# Altium PCB 十六路输出.PcbDoc (part 1 of 3)
Units mm, origin at the board's own origin, x right, y up, seen from the top; angles counter-clockwise.
Board outline 122.4 x 87.4 mm, 2 copper layers (Top Layer, Bottom Layer); 99 components, 112 nets, 383 pads, 41 vias.
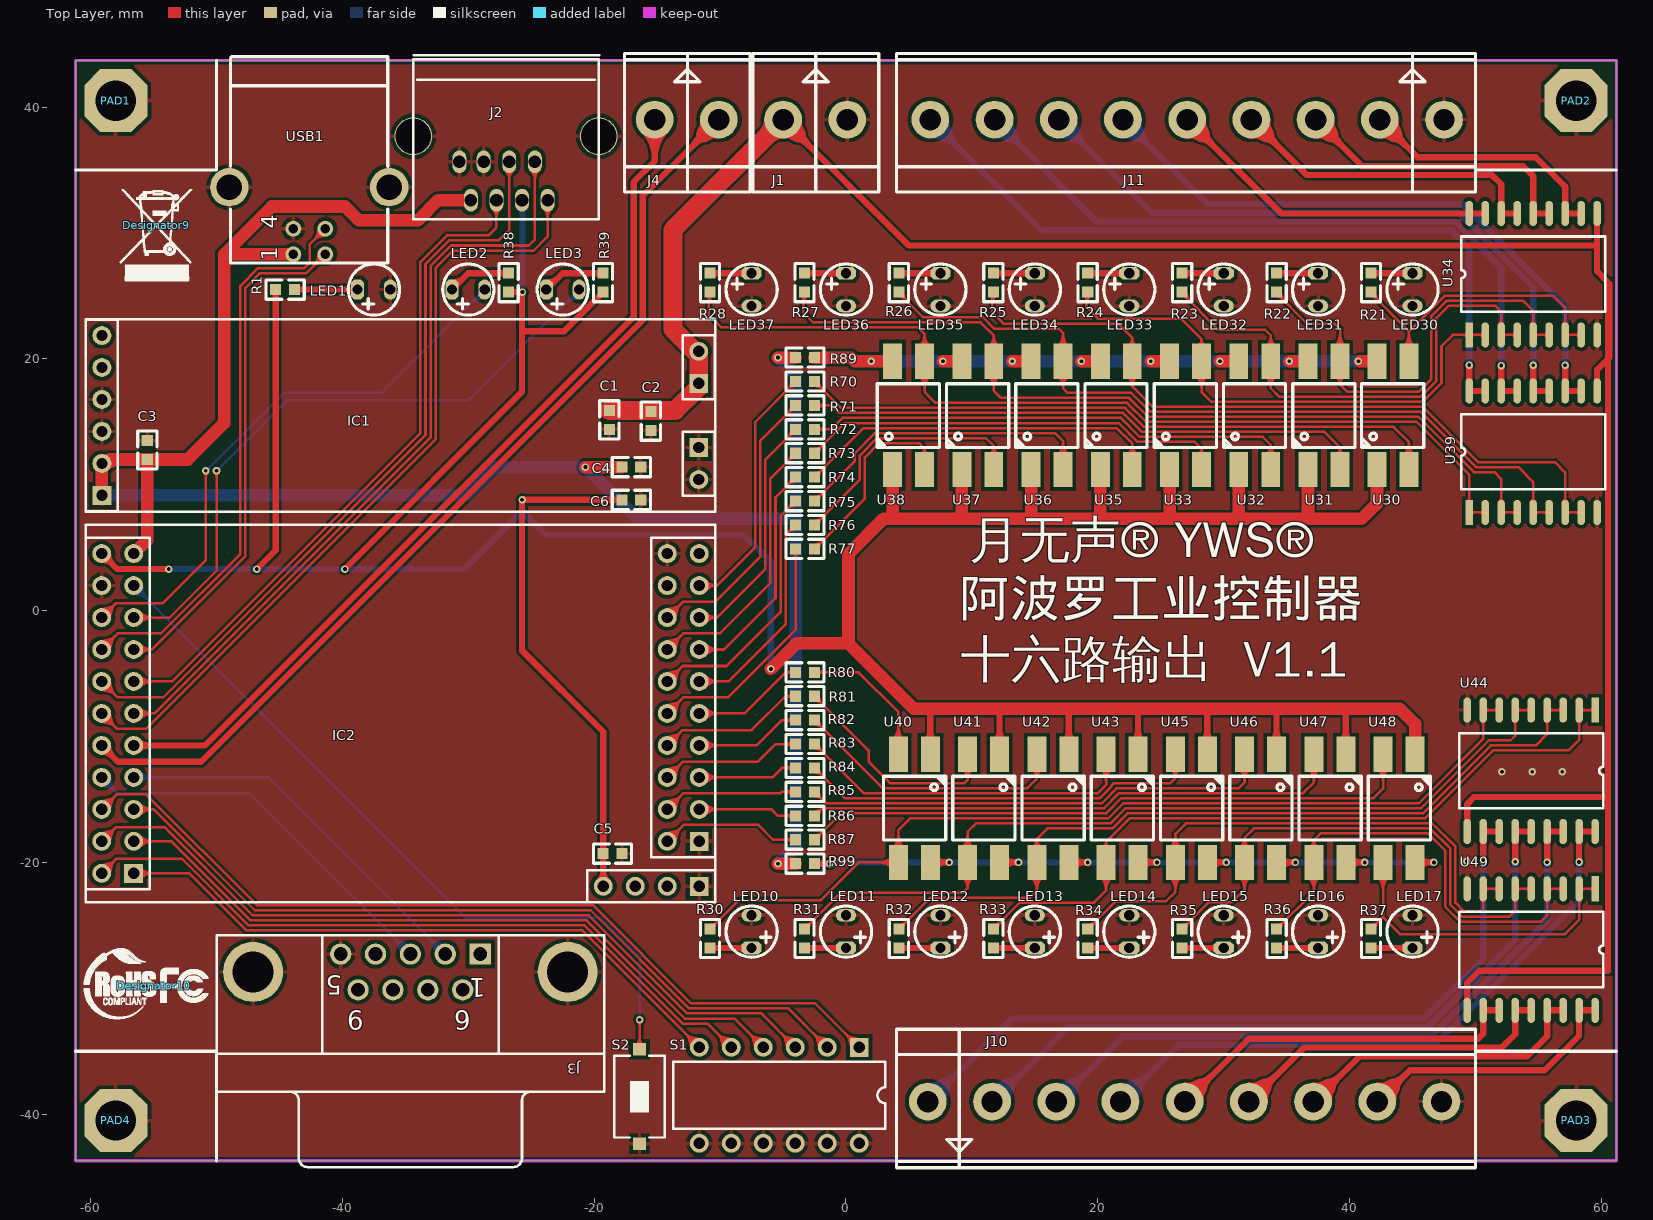
[diagram p0: Top Layer view]
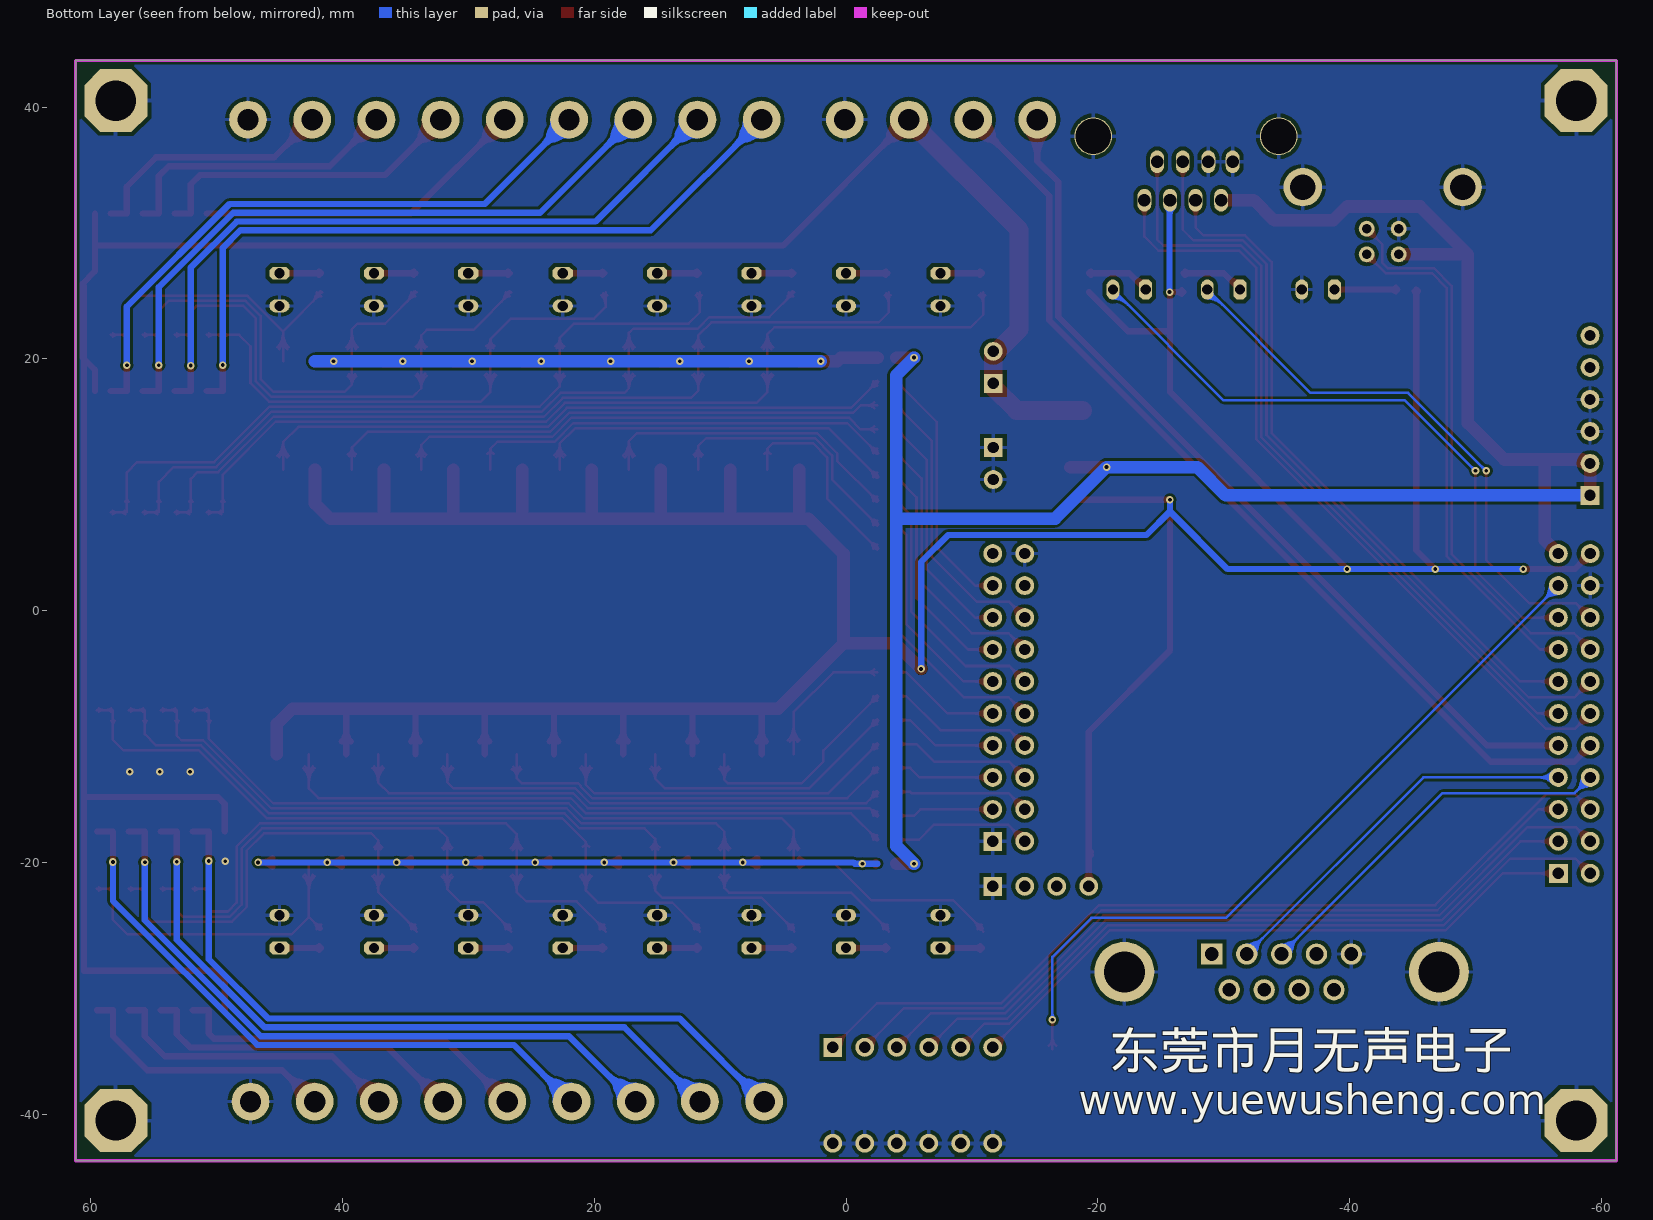
[diagram p1: Bottom Layer view, seen from below]

## Layer stack, top to bottom
Top Layer: signal copper 0.0356
Dielectric: dielectric 0.32, FR-4, Dk 4.8
Bottom Layer: signal copper 0.0356

## Board outline
-61.2,-43.7 61.2,-43.7 61.2,43.7 -61.2,43.7

## Design rules (kind name [scope] priority, off if disabled: settings)
Clearance [(InPadClass('All Pads')) vs InPolygon] p1: gap=0.3
Clearance Clearance_1 [All] p2: gap=0.2
ComponentClearance [All] p1 off: gap=0.254 collisioncheckmode=3 verticalgap=0.254 showdistances=FALSE
PlaneConnect [All] p1: planeconnectstyle=Relief reliefexpansion=0 reliefentries=4 reliefconductorwidth=0.3 reliefairgap=0.508
PolygonConnect PolygonConnect_1 [All vs IsComponentPad] p1: connectstyle=Relief reliefconductorwidth=0.3 reliefentries=4 polygonreliefangle="90 Angle" airgapwidth=0.3
PolygonConnect [All] p2: connectstyle=Direct reliefconductorwidth=0.3 reliefentries=4 polygonreliefangle="90 Angle" airgapwidth=0.3
RoomDefinition 3、十六路输出 [InComponentClass('3、十六路输出')] p1: confinementstyle=ConfineIn formatcopy=TRUE lockcomponents=FALSE outline -12,23.5 -12,28 3.5,28 3.5,46.6 62,46.6 62,-46.8 3.5,-46.8 3.5,-28 -12,-28 -12,-23.5 -9,-23.5 -9,23.5
RoomDefinition 公共电路 [InComponentClass('公共电路')] p2: confinementstyle=ConfineIn formatcopy=TRUE lockcomponents=FALSE outline -62,-44.5 3.5,-44.5 3.5,-43.7 61.2,-43.7 61.2,43.7 50,43.7 50,35 61.2,35 61.2,-35 50,-35 50,-43.7 3.5,-43.7 3.5,-28 -12,-28 -12,-23.5 -9.5,-23.5 -9.5,23.5 -12,23.5 -12,28 3.5,28 3.5,44.5 -62,44.5
RoutingVias [All] p1: holewidth=0.3 width=0.6 viastyle="Through Hole" minholewidth=0.3 minwidth=0.6 maxholewidth=0.3 maxwidth=0.6
SolderMaskExpansion [All] p1: expansion=0.102
Width [All] p1: maxlimit=2 minlimit=0.16 preferedwidth=0.2 minimp=50.000000 maximp=50.000000 favimp=50.000000
26 further rules are at their usual default settings.

## Classes and differential pairs
component class 公共电路: C1 C2 C3 C4 C5 C6 Designator9 Designator10 IC1 IC2 J1 J2 J3 J4 LED1 LED2 LED3 PAD1 PAD2 PAD3 PAD4 R1 R38 R39 S1 S2 usb1
component class 3、十六路输出: J10 J11 LED10 LED11 LED12 LED13 LED14 LED15 LED16 LED17 LED30 LED31 LED32 LED33 LED34 LED35 LED36 LED37 R21 R22 R23 R24 R25 R26 R27 R28 R30 R31 R32 R33 R34 R35 R36 R37 R70 R71 R72 R73 R74 R75 R76 R77 R80 R81 R82 R83 R84 R85 R86 R87 R89 R99 U30 U31 U32 U33 U34 U35 U36 U37 U38 U39 U40 U41 U42 U43 U44 U45 U46 U47 U48 U49

## Components (designator, comment, footprint, x,y, rotation, side; value= is the part's Value field where it differs from the comment)
C1 "104" 0603A -18.8,15.9 r270 top
C2 "104" 0603A -15.5,15.8 r270 top
C3 "104" 0603A -55.5,12 r90 top
C4 "104" 0603A -17.8,11.4 r0 top
C5 "104" 0603A -19.3,-19.3 r0 top
C6 "104" 0603A -17.8,8.8 r0 top
Designator9 "" HS -54.8,30.6 r0 top
Designator10 "" fc -55,-29.8 r0 top
IC1 "扩展模块电源板" 扩展模块电源板 -35.4,15.5 r180 top
IC2 "扩展模块核心板" 扩展模块核心板 -35.4,-8.2 r0 top
J1 "CON2" CON2*5.1 0.1,39 r0 top
J2 "CON8" "od-rj45 - duplicate" -23.7,32.6 r180 top
J3 "D Connector 9" DSUB1.385-2H9 -34.6,-38.2 r180 top
J4 "CON2" CON2*5.1 -10.1,39 r0 top
J10 "CON9" CON9*5.1 6.5,-39 r180 top
J11 "CON9" CON9*5.1 47.5,39 r0 top
LED1 "LED" LED2.5 -37.5,25.5 r180 top
LED2 "LED" LED2.5 -30,25.5 r180 top
LED3 "LED" LED2.5 -22.5,25.5 r180 top
LED10 "LED" LED2.5 -7.5,-25.5 r270 top (schematic designator LED18)
LED11 "LED" LED2.5 0,-25.5 r270 top
LED12 "LED" LED2.5 7.5,-25.5 r270 top
LED13 "LED" LED2.5 15,-25.5 r270 top
LED14 "LED" LED2.5 22.5,-25.5 r270 top
LED15 "LED" LED2.5 30,-25.5 r270 top
LED16 "LED" LED2.5 37.5,-25.5 r270 top
LED17 "LED" LED2.5 45,-25.5 r270 top
LED30 "LED" LED2.5 45,25.5 r90 top
LED31 "LED" LED2.5 37.5,25.5 r90 top
LED32 "LED" LED2.5 30,25.5 r90 top
LED33 "LED" LED2.5 22.5,25.5 r90 top
LED34 "LED" LED2.5 15,25.5 r90 top
LED35 "LED" LED2.5 7.5,25.5 r90 top
LED36 "LED" LED2.5 0,25.5 r90 top
LED37 "LED" LED2.5 -7.5,25.5 r90 top
PAD1 "PAD" PAD -58,40.5 r0 top
PAD2 "PAD" PAD 58,40.5 r0 top
PAD3 "PAD" PAD 58,-40.5 r0 top
PAD4 "PAD" PAD -58,-40.5 r0 top
R1 "160" 0603A -45.3,25.5 r0 top
R21 "560R" 0603A 41.7,25.3 r90 top
R22 "560R" 0603A 34.2,25.3 r90 top
R23 "560R" 0603A 26.7,25.3 r90 top
R24 "560R" 0603A 19.2,25.3 r90 top
R25 "560R" 0603A 11.7,25.3 r90 top
R26 "560R" 0603A 4.2,25.3 r90 top
R27 "560R" 0603A -3.3,25.3 r90 top
R28 "560R" 0603A -10.8,25.3 r90 top
R30 "560R" 0603A -10.8,-25.3 r270 top
R31 "560R" 0603A -3.3,-25.3 r270 top
R32 "560R" 0603A 4.2,-25.3 r270 top
R33 "560R" 0603A 11.7,-25.3 r270 top
R34 "560R" 0603A 19.2,-25.3 r270 top
R35 "560R" 0603A 26.7,-25.3 r270 top
R36 "560R" 0603A 34.2,-25.3 r270 top
R37 "560R" 0603A 41.7,-25.3 r270 top
R38 "160" 0603A -26.8,25.3 r90 top
R39 "160" 0603A -19.3,25.3 r90 top
R70 "51" 0603A -4,18.2 r0 top
R71 "51" 0603A -4,16.3 r0 top
R72 "51" 0603A -4,14.4 r0 top
R73 "51" 0603A -4,12.5 r0 top
R74 "51" 0603A -4,10.6 r0 top
R75 "51" 0603A -4,8.7 r0 top
R76 "51" 0603A -4,6.8 r0 top
R77 "51" 0603A -4,4.9 r0 top
R80 "51" 0603A -4,-4.9 r0 top
R81 "51" 0603A -4,-6.8 r0 top
R82 "51" 0603A -4,-8.7 r0 top
R83 "51" 0603A -4,-10.6 r0 top
R84 "51" 0603A -4,-12.5 r0 top
R85 "51" 0603A -4,-14.4 r0 top
R86 "51" 0603A -4,-16.3 r0 top
R87 "51" 0603A -4,-18.2 r0 top
R89 "NC" 0603A -2.5,20.1 r180 top
R99 "NC" 0603A -2.5,-20.1 r180 top
S1 "SW DIP-6" DIP-12/SW -5.3,-38.5 r180 top
S2 "RESRT" SW-PB2 -16.4,-38.6 r270 top
U30 "TLP521-1" PC817 42.175,11.5 r90 top
U31 "TLP521-1" PC817 36.7,11.5 r90 top
U32 "TLP521-1" PC817 31.2,11.5 r90 top
U33 "TLP521-1" PC817 25.7,11.5 r90 top
U34 "ULN2803" SOL18 49.5,21.9 r90 top
U35 "TLP521-1" PC817 20.2,11.5 r90 top
U36 "TLP521-1" PC817 14.7,11.5 r90 top
U37 "TLP521-1" PC817 9.2,11.5 r90 top
U38 "TLP521-1" PC817 3.7,11.5 r90 top
U39 "ULN2803" SOL18 49.5,7.8 r90 top
U40 "TLP521-1" PC817 6.7,-11.7 r270 top
U41 "TLP521-1" PC817 12.2,-11.7 r270 top
U42 "TLP521-1" PC817 17.7,-11.7 r270 top
U43 "TLP521-1" PC817 23.2,-11.7 r270 top
U44 "ULN2803" sol18 59.5,-7.9 r270 top
U45 "TLP521-1" PC817 28.7,-11.7 r270 top
U46 "TLP521-1" PC817 34.2,-11.7 r270 top
U47 "TLP521-1" PC817 39.7,-11.7 r270 top
U48 "TLP521-1" PC817 45.2,-11.7 r270 top
U49 "ULN2803" sol18 59.5,-22.1 r270 top
USB1 "USB" USB-B3 -43.9,28.3 r90 top

## Footprints (in the part's own frame and the unit in brackets; to place one, negate y for a bottom-side part, rotate by r counter-clockwise, add the part's x,y. Pads: shape width x height; smd on the part's side, far side on the other; paste and mask are expansions set on the pad)
0603A [mm]
  rect 0.88x0.88 smd: 1(0,0) 2(1.5,0)
  silkscreen extent -0.76,-0.76 2.26,0.76
CON2*5.1 [mm]
  round 3 hole 1.7: 1(0,0) 2(-5.1,0)
  silkscreen extent -7.5,-5.75 2.5,5.25
CON9*5.1 [mm]
  round 3 hole 1.7: 1(0,0) 2(-5.1,0) 3(-10.2,0) 4(-15.3,0) 5(-20.4,0) 6(-25.5,0) 7(-30.6,0) 8(-35.7,0) 9(-40.8,0)
  silkscreen extent -43.5,-5.75 2.5,5.25
DIP-12/SW [mm] "DIP Switch; 12 Leads"
  rect 1.5x1.5 hole 0.9: 1(-6.35,-3.81)
  round 1.5 hole 0.9: 2(-3.81,-3.81) 3(-1.27,-3.81) 4(1.27,-3.81) 5(3.81,-3.81) 6(6.35,-3.81) 7(6.35,3.81) 8(3.81,3.81) 9(1.27,3.81) 10(-1.27,3.81) 11(-3.81,3.81) 12(-6.35,3.81)
  silkscreen extent -8.43,-2.65 8.41,2.65
DSUB1.385-2H9 [mm] "Connector; D Subminiature; 9 Position; Right Angle; Pitch 1.385 mm"
  rect 1.69x1.69 hole 1.09: 1(-5.54,-10.92)
  round 1.69 hole 1.09: 2(-2.77,-10.92) 3(0,-10.92) 4(2.77,-10.92) 5(5.54,-10.92) 6(-4.155,-8.08) 7(-1.385,-8.08) 8(1.385,-8.08) 9(4.155,-8.08)
  round 4.76 hole 3.26: 10(-12.495,-9.5) 11(12.495,-9.5)
  silkscreen extent -15.4,-12.4 15.4,6
fc [mm]
  silkscreen extent -5.53,-2.62 4.36,3
HS [mm]
  silkscreen extent -2.87,-4.39 2.87,2.87
LED2.5 [mil]
  oct 40x63 hole 32: A(51.18,0)
  oval 40x63 hole 32: K(-51.18,0)
  silkscreen extent -80,-80 80,80
"od-rj45 - duplicate" [mm]
  oval 1.1x1.8 hole 1: 1(0,0) 2(1.016,-3.048) 3(2.032,0) 4(3.048,-3.048) 5(4.064,0) 6(5.08,-3.048) 7(6.096,0) 8(7.012,-3.048)
  round 3 hole 2.8: 8(-4.064,-5.08) 8(10.668,-5.08)
  silkscreen extent -4.1,-11.53 10.67,1.52
PAD [mm]
  oct 5x5 hole 3.2: 1(0,0)
PC817 [mm]
  rect 2.8x1.5 smd: 1(-0.3,0) 2(-0.3,-2.54) 3(8.3,-2.54) 4(8.3,0)
  silkscreen extent 1.46,-3.72 6.53,1.22
SOL18 [mm]
  rect 2x0.6 smd: 1(0,0)
  oval 2x0.6 smd: 2(0,-1.27) 3(0,-2.54) 4(0,-3.81) 5(0,-5.08) 6(0,-6.35) 7(0,-7.62) 8(0,-8.89) 9(0,-10.16) 10(9.65,-10.16) 11(9.65,-8.89) 12(9.65,-7.62) 13(9.65,-6.35) 14(9.65,-5.08) 15(9.65,-3.81) 16(9.65,-2.54) 17(9.65,-1.27) 18(9.65,0)
  silkscreen extent 1.84,-10.79 7.82,0.64
sol18 [mm]
  rect 2x0.6 smd: 1(0,0)
  oval 2x0.6 smd: 2(0,-1.27) 3(0,-2.54) 4(0,-3.81) 5(0,-5.08) 6(0,-6.35) 7(0,-7.62) 8(0,-8.89) 9(0,-10.16) 10(9.65,-10.16) 11(9.65,-8.89) 12(9.65,-7.62) 13(9.65,-6.35) 14(9.65,-5.08) 15(9.65,-3.81) 16(9.65,-2.54) 17(9.65,-1.27) 18(9.65,0)
  silkscreen extent 1.84,-10.79 7.82,0.64
SW-PB2 [mm]
  rect 1x1 smd: 1(-3.75,0) 2(3.75,0)
  silkscreen extent -3.25,-2 3.25,2
USB-B3 [mil]
  round 50 hole 30: 1(0,0) 2(0,-100) 3(80,-100) 4(80,0)
  round 120 hole 80: 5(210,200) 6(210,-300)
  silkscreen extent -28,-295 618,197
扩展模块核心板 [mm]
  rect 1.5x1.5 hole 0.9: 1(-21.18,-12.67) 42(23.74,-10.13) 43(23.74,-13.7)
  round 1.5 hole 0.9: 2(-23.72,-12.67) 3(-21.18,-10.13) 4(-23.72,-10.13) 5(-21.18,-7.59) 6(-23.72,-7.59) 7(-21.18,-5.05) 8(-23.72,-5.05) 9(-21.18,-2.51) 10(-23.72,-2.51) 11(-21.18,0.03) 12(-23.72,0.03) 13(-21.18,2.57) 14(-23.72,2.57) 15(-21.18,5.11) 16(-23.72,5.11) 17(-21.18,7.65) 18(-23.72,7.65) 19(-21.18,10.19) 20(-23.72,10.19) 21(-21.18,12.73) 22(-23.72,12.73) 23(21.2,12.73) 24(23.74,12.73) 25(21.2,10.19) 26(23.74,10.19) 27(21.2,7.65) 28(23.74,7.65) 29(21.2,5.11) 30(23.74,5.11) 31(21.2,2.57) 32(23.74,2.57) 33(21.2,0.03) 34(23.74,0.03) 35(21.2,-2.51) 36(23.74,-2.51) 37(21.2,-5.05) 38(23.74,-5.05) 39(21.2,-7.59) 40(23.74,-7.59) 41(21.2,-10.13) 44(21.2,-13.7) 45(18.66,-13.7) 46(16.12,-13.7)
  silkscreen extent -24.99,-14.97 25.01,15.03
扩展模块电源板 [mm]
  round 1.5 hole 0.9: 1(-23.7,-5.09) 2(-23.7,5.09) 3(23.7,3.81) 4(23.7,-1.27) 4(23.7,1.27) 5(23.7,-6.35) 5(23.7,-3.81)
  rect 1.5x1.5 hole 0.9: 1(-23.7,-2.55) 2(-23.7,2.55) 3(23.7,6.35)
  silkscreen extent -25,-7.65 25,7.65

## Part data
C1 C2 C3 C4 C5 C6: library part CAP, "Capacitor"
Designator9 Designator10: library part PAD
J3: "Receptacle Assembly, 9 Position, Right Angle"
R1 R38 R39: library part RES2
R21 R22 R23 R24 R25 R26 R27 R28 R30 R31 R32 R33 R34 R35 R36 R37 R70 R71 R72 R73 R74 R75 R76 R77 R80 R81 R82 R83 R84 R85 R86 R87 R89 R99: library part Res2, "Resistor"
S1: "DIP Switch, 6 Position, SPST"
S2: library part SW-PB
U30 U31 U32 U33 U35 U36 U37 U38 U40 U41 U42 U43 U45 U46 U47 U48: "Single NPN PhotoTransistor OptoCoupler."
USB1: library part "HEADER 3X2"

## Via types
v1: diameter 0.6, hole 0.3, Top Layer to Bottom Layer, 41 vias

## Nets (pads, with @x,y where several pads share a name; then routed paths per layer and width w, separated by ;. In a path a pad name is that pad's centre, name@x,y a point inside that pad or via, vN(x,y) a via of type N, cw(c..) or ccw(c..) an arc to the next point about the centre after c; other vN are vias at no path point)
485A: IC2.10 J4.1 | length 102
  Top Layer w0.5: IC2.10@-59.12,-10.41 IC2.10@-58.97,-10.56 ; -58.49,-11.379 cw(c-58.264,-10.535) IC2.10@-59.12,-10.71 ; -58.451,-11.34 ccw(c-59.295,-11.566) IC2.10@-59.12,-10.71 ; -11.667,37.816 cw(c-9.752,37.303) J4.1@-10.15,39.245 ; -11.284,37.433 ccw(c-11.797,39.348) J4.1@-9.855,38.95 ; J4.1@-10.1,39 -16.15,32.95 -16.15,23.06 -51.21,-12 -57.83,-12 IC2.10@-59.12,-10.71 ; -58.266,-11.564 cw(c-57.413,-10.71) -58.62,-10.71 ccw(c-57.413,-10.71) -58.266,-11.564 ; -58.266,-11.564 ccw(c-59.12,-12.417) -59.12,-11.21 cw(c-59.12,-12.417) -58.266,-11.564 ; -12.234,36.866 cw(c-10.1,34.732) -10.1,37.75 ccw(c-10.1,34.732) -12.234,36.866 ; -12.234,36.866 ccw(c-14.368,39) -11.35,39 cw(c-14.368,39) -12.234,36.866 ; -11.38,37.72 cw(c-10.1,36.439) -10.1,38.25 ccw(c-10.1,36.439) -11.38,37.72 ; -11.38,37.72 ccw(c-12.661,39) -10.85,39 cw(c-12.661,39) -11.38,37.72
485B: IC2.9 J4.2 | length 89.1
  Top Layer w0.5: IC2.9@-56.58,-10.71 -50.91,-10.71 -16.85,23.35 -16.85,34.05 -15.2,35.7 J4.2@-15.2,39 ; -55.373,-10.71 cw(c-55.373,-9.503) -56.226,-10.356 ccw(c-55.373,-9.503) -55.373,-10.71 ; -55.373,-10.71 ccw(c-55.373,-11.917) -56.226,-11.064 cw(c-55.373,-11.917) -55.373,-10.71 ; -15.2,35.982 cw(c-12.182,35.982) -14.316,38.116 ccw(c-12.182,35.982) -15.2,35.982 ; -15.2,35.982 ccw(c-18.218,35.982) -16.084,38.116 cw(c-18.218,35.982) -15.2,35.982 ; -15.2,37.189 cw(c-13.389,37.189) -14.67,38.47 ccw(c-13.389,37.189) -15.2,37.189 ; -15.2,37.189 ccw(c-17.011,37.189) -15.73,38.47 cw(c-17.011,37.189) -15.2,37.189
+3.3V: C5.1 C6.1 IC2.22 IC2.46 J2.3 R1.1 R38.1 R39.1 U30.1 U31.1 U32.1 U33.1 U35.1 U36.1 U37.1 U38.1 U40.1 U41.1 U42.1 U43.1 U45.1 U46.1 U47.1 U48.1 | length 381.9
  Top Layer w0.5: IC2.22@-59.12,4.83 IC2.22@-58.97,4.68 ; -58.49,3.861 cw(c-58.264,4.705) IC2.22@-59.12,4.53 ; -58.451,3.9 ccw(c-59.295,3.674) IC2.22@-59.12,4.53 ; v1(-53.8,3.3) -57.89,3.3 IC2.22@-59.12,4.53 ; v1(-46.8,3.3) -45.3,4.8 R1.1@-45.3,25.5 ; v1(-39.8,3.3) -25.732,17.368 -25.732,22.2 ; R38.1@-26.8,25.3 v1(-25.7,25.3) -25.732,25.268 -25.732,22.2 ; R39.1@-19.3,25.3 -22.4,22.2 -25.732,22.2 ; IC2.46@-19.28,-21.9 -19.28,-9.62 -25.732,-3.168 v1(-25.732,8.8) C6.1@-17.8,8.8 ; U40.1@6.7,-11.4 6.7,-7.9 ; U41.1@12.2,-11.4 12.2,-7.8 ; U42.1@17.7,-11.4 17.7,-7.8 ; U43.1@23.2,-11.4 23.2,-7.9 ; U45.1@28.7,-11.4 28.7,-7.8 ; U46.1@34.2,-11.4 34.2,-7.8 ; U47.1@39.7,-11.4 39.7,-7.8 ; -58.266,3.676 cw(c-57.413,4.53) -58.62,4.53 ccw(c-57.413,4.53) -58.266,3.676 ; -58.266,3.676 ccw(c-59.12,2.823) -59.12,4.03 cw(c-59.12,2.823) -58.266,3.676 ; -45.3,25.041 cw(c-44.841,25.041) -45.166,25.366 ccw(c-44.841,25.041) -45.3,25.041 ; -45.3,25.041 ccw(c-45.759,25.041) -45.434,25.366 cw(c-45.759,25.041) -45.3,25.041 ; -26.341,25.3 cw(c-26.341,25.759) -26.666,25.434 ccw(c-26.341,25.759) -26.341,25.3 ; -26.341,25.3 ccw(c-26.341,24.841) -26.666,25.166 cw(c-26.341,24.841) -26.341,25.3 ; -19.28,-20.693 cw(c-20.487,-20.693) -19.634,-21.546 ccw(c-20.487,-20.693) -19.28,-20.693 ; -19.28,-20.693 ccw(c-18.073,-20.693) -18.926,-21.546 cw(c-18.073,-20.693) -19.28,-20.693 ; -18.259,8.8 cw(c-18.259,8.341) -17.934,8.666 ccw(c-18.259,8.341) -18.259,8.8 ; -18.259,8.8 ccw(c-18.259,9.259) -17.934,8.934 cw(c-18.259,9.259) -18.259,8.8 ; 6.7,-9.543 cw(c5.493,-9.543) 6.346,-10.396 ccw(c5.493,-9.543) 6.7,-9.543 ; 6.7,-9.543 ccw(c7.907,-9.543) 7.054,-10.396 cw(c7.907,-9.543) 6.7,-9.543 ; 12.2,-9.543 cw(c10.993,-9.543) 11.846,-10.396 ccw(c10.993,-9.543) 12.2,-9.543 ; 12.2,-9.543 ccw(c13.407,-9.543) 12.554,-10.396 cw(c13.407,-9.543) 12.2,-9.543 ; 17.7,-9.543 cw(c16.493,-9.543) 17.346,-10.396 ccw(c16.493,-9.543) 17.7,-9.543 ; 17.7,-9.543 ccw(c18.907,-9.543) 18.054,-10.396 cw(c18.907,-9.543) 17.7,-9.543 ; 23.2,-9.543 cw(c21.993,-9.543) 22.846,-10.396 ccw(c21.993,-9.543) 23.2,-9.543 ; 23.2,-9.543 ccw(c24.407,-9.543) 23.554,-10.396 cw(c24.407,-9.543) 23.2,-9.543 ; 28.7,-9.543 cw(c27.493,-9.543) 28.346,-10.396 ccw(c27.493,-9.543) 28.7,-9.543 ; 28.7,-9.543 ccw(c29.907,-9.543) 29.054,-10.396 cw(c29.907,-9.543) 28.7,-9.543 ; 34.2,-9.543 cw(c32.993,-9.543) 33.846,-10.396 ccw(c32.993,-9.543) 34.2,-9.543 ; 34.2,-9.543 ccw(c35.407,-9.543) 34.554,-10.396 cw(c35.407,-9.543) 34.2,-9.543 ; 39.7,-9.543 cw(c38.493,-9.543) 39.346,-10.396 ccw(c38.493,-9.543) 39.7,-9.543 ; 39.7,-9.543 ccw(c40.907,-9.543) 40.054,-10.396 cw(c40.907,-9.543) 39.7,-9.543 ; C5.1@-19.434,-19.434 cw(c-19.807,-19.807) -19.28,-19.807 ccw(c-19.807,-19.807) C5.1@-19.434,-19.434 ; C5.1@-19.434,-19.166 ccw(c-19.807,-18.793) -19.28,-18.793 cw(c-19.807,-18.793) C5.1@-19.434,-19.166
  Top Layer w1: v1(-5.967,-4.633) -3.935,-2.6 0.2,-2.6 ; U38.1@3.7,11.2 3.7,7.3 ; U37.1@9.2,11.2 9.2,7.3 ; U36.1@14.7,11.2 14.7,7.3 ; U35.1@20.2,11.2 20.2,7.3 ; 25.7,7.4 U33.1@25.7,11.2 ; 31.2,7.4 U32.1@31.2,11.2 ; U31.1@36.7,11.2 36.7,7.3 ; U30.1@42.175,11.2 42.175,8.5 40.975,7.3 36.7,7.3 ; U48.1@45.2,-11.4 45.2,-9 44,-7.8 39.7,-7.8 34.2,-7.8 28.7,-7.8 17.7,-7.8 12.2,-7.8 5.4,-7.8 0.2,-2.6 ; 0.2,-2.6 0.2,4.5 3,7.3 3.7,7.3 ; 3.7,7.3 9.2,7.3 ; 9.2,7.3 14.7,7.3 ; 14.7,7.3 20.2,7.3 ; 20.2,7.3 36.7,7.3
  Bottom Layer w0.5: v1(-53.8,3.3) v1(-46.8,3.3) v1(-39.8,3.3) -30.3,3.3 -25.732,7.868 ; v1(-25.732,8.8) -25.732,7.868 ; J2.3@-25.732,32.6 -25.7,32.568 v1(-25.7,25.3) ; v1(-5.967,-4.633) -5.967,3.867 -8.1,6 -23.864,6 -25.732,7.868 ; J2.3@-25.944,32.038 cw(c-26.534,31.448) -25.7,31.448 ccw(c-26.534,31.448) J2.3@-25.944,32.038 ; -25.7,31.603 cw(c-25.085,31.603) -25.52,32.038 ccw(c-25.085,31.603) -25.7,31.603
+5V: C3.1 C4.1 IC1.3 IC2.21 J2.7 R89.2 R99.2 USB1.1 | length 170.9
  Top Layer w1: IC1.3@-59.1,8.85 IC1.3@-59.1,9.15 -59.1,11.39 -58.49,12 C3.1@-55.5,12 ; IC1.3@-58.96,11.897 ccw(c-58.611,12.414) -58.299,11.874 ; IC2.21@-56.58,4.53 -55.5,5.61 C3.1@-55.5,12 ; USB1.1@-43.9,28.3 -49.4,28.3 ; J2.7@-29.796,32.6 -32.4,32.6 -34,31 -38.7,31 -39.8,32.1 -45.6,32.1 -49.4,28.3 ; v1(-20.7,11.4) C4.1@-17.8,11.4 ; v1(-5.4,-20.1) R99.2@-4,-20.1 ; v1(-5.4,20.1) R89.2@-4,20.1 ; C3.1@-55.5,12 -52.3,12 -49.4,14.9 -49.4,28.3 ; IC1.3@-58.923,11.513 cw(c-57.748,10.338) -57.748,12 ccw(c-57.748,10.338) IC1.3@-58.923,11.513
  Bottom Layer w1: IC1.3@-59.1,9.15 -30.15,9.15 -27.9,11.4 v1(-20.7,11.4) -16.6,7.3 -4,7.3 ; v1(-5.4,-20.1) -4,-18.7 -4,7.3 ; v1(-5.4,20.1) -4,18.7 -4,7.3
GND: C1.2 C2.2 C3.2 C4.2 C5.2 C6.2 IC1.2 IC1.4 IC2.20 IC2.23 IC2.42 IC2.43 J1.1 J2.6 J2.8 J3.5 J3.10 J3.11 J10.9 J11.1 LED1.K LED10.K LED11.K LED12.K LED13.K LED14.K LED15.K LED16.K LED17.K LED30.K LED31.K LED32.K LED33.K LED34.K LED35.K LED36.K LED37.K PAD1.1 PAD2.1 PAD3.1 PAD4.1 S1.7 S1.8 S1.9 S1.10 S1.11 S1.12 S2.2 U34.9 U39.9 U44.9 U49.9 USB1.4 USB1.5 USB1.6
  other v1: 49.3,-19.9 52.1,-12.8 54.5,-12.8 56.9,-12.8
NetLED1_A: LED1.A R1.2 | length 8.4
  Top Layer w0.5: R1.2@-43.8,25.5 LED1.A@-38.8,25.5 ; -43.341,25.5 cw(c-43.341,25.959) -43.666,25.634 ccw(c-43.341,25.959) -43.341,25.5 ; -43.341,25.5 ccw(c-43.341,25.041) -43.666,25.366 cw(c-43.341,25.041) -43.341,25.5 ; -39.423,25.5 cw(c-39.423,24.877) -38.982,25.318 ccw(c-39.423,24.877) -39.423,25.5 ; -39.423,25.5 ccw(c-39.423,26.123) -38.982,25.682 cw(c-39.423,26.123) -39.423,25.5
NetLED2_A: LED2.A R38.2 | length 7.5
  Top Layer w0.5: LED2.A@-31.3,25.5 -30,26.8 R38.2@-26.8,26.8 ; LED2.A@-31.3,26.05 ccw(c-31.3,27.378) -30.361,26.439 ; -27.259,26.8 cw(c-27.259,26.341) -26.934,26.666 ccw(c-27.259,26.341) -27.259,26.8 ; -27.259,26.8 ccw(c-27.259,27.259) -26.934,26.934 cw(c-27.259,27.259) -27.259,26.8
NetLED3_A: LED3.A R39.2 | length 7.5
  Top Layer w0.5: LED3.A@-23.8,25.5 -22.5,26.8 R39.2@-19.3,26.8 ; LED3.A@-23.8,26.05 ccw(c-23.8,27.378) -22.861,26.439 ; -19.759,26.8 cw(c-19.759,26.341) -19.434,26.666 ccw(c-19.759,26.341) -19.759,26.8 ; -19.759,26.8 ccw(c-19.759,27.259) -19.434,26.934 cw(c-19.759,27.259) -19.759,26.8
NetLED10_A: LED10.A R30.2 | length 6.7
  Top Layer w0.5: R30.2@-10.8,-26.8 LED10.A@-7.5,-26.8 ; -10.341,-26.8 cw(c-10.341,-26.341) -10.666,-26.666 ccw(c-10.341,-26.341) -10.341,-26.8 ; -10.341,-26.8 ccw(c-10.341,-27.259) -10.666,-26.934 cw(c-10.341,-27.259) -10.341,-26.8 ; -8.415,-26.8 cw(c-8.415,-27.423) -7.975,-26.982 ccw(c-8.415,-27.423) -8.415,-26.8 ; -8.415,-26.8 ccw(c-8.415,-26.177) -7.975,-26.618 cw(c-8.415,-26.177) -8.415,-26.8
NetLED11_A: LED11.A R31.2 | length 6.7
  Top Layer w0.5: R31.2@-3.3,-26.8 LED11.A@0,-26.8 ; -2.841,-26.8 cw(c-2.841,-26.341) -3.166,-26.666 ccw(c-2.841,-26.341) -2.841,-26.8 ; -2.841,-26.8 ccw(c-2.841,-27.259) -3.166,-26.934 cw(c-2.841,-27.259) -2.841,-26.8 ; -0.915,-26.8 cw(c-0.915,-27.423) -0.475,-26.982 ccw(c-0.915,-27.423) -0.915,-26.8 ; -0.915,-26.8 ccw(c-0.915,-26.177) -0.475,-26.618 cw(c-0.915,-26.177) -0.915,-26.8
NetLED12_A: LED12.A R32.2 | length 6.7
  Top Layer w0.5: R32.2@4.2,-26.8 LED12.A@7.5,-26.8 ; 4.659,-26.8 cw(c4.659,-26.341) 4.334,-26.666 ccw(c4.659,-26.341) 4.659,-26.8 ; 4.659,-26.8 ccw(c4.659,-27.259) 4.334,-26.934 cw(c4.659,-27.259) 4.659,-26.8 ; 6.585,-26.8 cw(c6.585,-27.423) 7.025,-26.982 ccw(c6.585,-27.423) 6.585,-26.8 ; 6.585,-26.8 ccw(c6.585,-26.177) 7.025,-26.618 cw(c6.585,-26.177) 6.585,-26.8
NetLED13_A: LED13.A R33.2 | length 6.7
  Top Layer w0.5: R33.2@11.7,-26.8 LED13.A@15,-26.8 ; 12.159,-26.8 cw(c12.159,-26.341) 11.834,-26.666 ccw(c12.159,-26.341) 12.159,-26.8 ; 12.159,-26.8 ccw(c12.159,-27.259) 11.834,-26.934 cw(c12.159,-27.259) 12.159,-26.8 ; 14.085,-26.8 cw(c14.085,-27.423) 14.525,-26.982 ccw(c14.085,-27.423) 14.085,-26.8 ; 14.085,-26.8 ccw(c14.085,-26.177) 14.525,-26.618 cw(c14.085,-26.177) 14.085,-26.8
NetLED14_A: LED14.A R34.2 | length 6.7
  Top Layer w0.5: R34.2@19.2,-26.8 LED14.A@22.5,-26.8 ; 19.659,-26.8 cw(c19.659,-26.341) 19.334,-26.666 ccw(c19.659,-26.341) 19.659,-26.8 ; 19.659,-26.8 ccw(c19.659,-27.259) 19.334,-26.934 cw(c19.659,-27.259) 19.659,-26.8 ; 21.585,-26.8 cw(c21.585,-27.423) 22.025,-26.982 ccw(c21.585,-27.423) 21.585,-26.8 ; 21.585,-26.8 ccw(c21.585,-26.177) 22.025,-26.618 cw(c21.585,-26.177) 21.585,-26.8
NetLED15_A: LED15.A R35.2 | length 6.7
  Top Layer w0.5: R35.2@26.7,-26.8 LED15.A@30,-26.8 ; 27.159,-26.8 cw(c27.159,-26.341) 26.834,-26.666 ccw(c27.159,-26.341) 27.159,-26.8 ; 27.159,-26.8 ccw(c27.159,-27.259) 26.834,-26.934 cw(c27.159,-27.259) 27.159,-26.8 ; 29.085,-26.8 cw(c29.085,-27.423) 29.525,-26.982 ccw(c29.085,-27.423) 29.085,-26.8 ; 29.085,-26.8 ccw(c29.085,-26.177) 29.525,-26.618 cw(c29.085,-26.177) 29.085,-26.8
NetLED16_A: LED16.A R36.2 | length 6.7
  Top Layer w0.5: R36.2@34.2,-26.8 LED16.A@37.5,-26.8 ; 34.659,-26.8 cw(c34.659,-26.341) 34.334,-26.666 ccw(c34.659,-26.341) 34.659,-26.8 ; 34.659,-26.8 ccw(c34.659,-27.259) 34.334,-26.934 cw(c34.659,-27.259) 34.659,-26.8 ; 36.585,-26.8 cw(c36.585,-27.423) 37.025,-26.982 ccw(c36.585,-27.423) 36.585,-26.8 ; 36.585,-26.8 ccw(c36.585,-26.177) 37.025,-26.618 cw(c36.585,-26.177) 36.585,-26.8
NetLED17_A: LED17.A R37.2 | length 6.7
  Top Layer w0.5: R37.2@41.7,-26.8 LED17.A@45,-26.8 ; 42.159,-26.8 cw(c42.159,-26.341) 41.834,-26.666 ccw(c42.159,-26.341) 42.159,-26.8 ; 42.159,-26.8 ccw(c42.159,-27.259) 41.834,-26.934 cw(c42.159,-27.259) 42.159,-26.8 ; 44.085,-26.8 cw(c44.085,-27.423) 44.525,-26.982 ccw(c44.085,-27.423) 44.085,-26.8 ; 44.085,-26.8 ccw(c44.085,-26.177) 44.525,-26.618 cw(c44.085,-26.177) 44.085,-26.8
NetLED30_A: LED30.A R21.2 | length 6.7
  Top Layer w0.5: R21.2@41.7,26.8 LED30.A@45,26.8 ; 42.159,26.8 cw(c42.159,27.259) 41.834,26.934 ccw(c42.159,27.259) 42.159,26.8 ; 42.159,26.8 ccw(c42.159,26.341) 41.834,26.666 cw(c42.159,26.341) 42.159,26.8 ; 44.085,26.8 cw(c44.085,26.177) 44.525,26.618 ccw(c44.085,26.177) 44.085,26.8 ; 44.085,26.8 ccw(c44.085,27.423) 44.525,26.982 cw(c44.085,27.423) 44.085,26.8
NetLED31_A: LED31.A R22.2 | length 6.7
  Top Layer w0.5: R22.2@34.2,26.8 LED31.A@37.5,26.8 ; 34.659,26.8 cw(c34.659,27.259) 34.334,26.934 ccw(c34.659,27.259) 34.659,26.8 ; 34.659,26.8 ccw(c34.659,26.341) 34.334,26.666 cw(c34.659,26.341) 34.659,26.8 ; 36.585,26.8 cw(c36.585,26.177) 37.025,26.618 ccw(c36.585,26.177) 36.585,26.8 ; 36.585,26.8 ccw(c36.585,27.423) 37.025,26.982 cw(c36.585,27.423) 36.585,26.8
NetLED32_A: LED32.A R23.2 | length 6.7
  Top Layer w0.5: R23.2@26.7,26.8 LED32.A@30,26.8 ; 27.159,26.8 cw(c27.159,27.259) 26.834,26.934 ccw(c27.159,27.259) 27.159,26.8 ; 27.159,26.8 ccw(c27.159,26.341) 26.834,26.666 cw(c27.159,26.341) 27.159,26.8 ; 29.085,26.8 cw(c29.085,26.177) 29.525,26.618 ccw(c29.085,26.177) 29.085,26.8 ; 29.085,26.8 ccw(c29.085,27.423) 29.525,26.982 cw(c29.085,27.423) 29.085,26.8
NetLED33_A: LED33.A R24.2 | length 6.7
  Top Layer w0.5: R24.2@19.2,26.8 LED33.A@22.5,26.8 ; 19.659,26.8 cw(c19.659,27.259) 19.334,26.934 ccw(c19.659,27.259) 19.659,26.8 ; 19.659,26.8 ccw(c19.659,26.341) 19.334,26.666 cw(c19.659,26.341) 19.659,26.8 ; 21.585,26.8 cw(c21.585,26.177) 22.025,26.618 ccw(c21.585,26.177) 21.585,26.8 ; 21.585,26.8 ccw(c21.585,27.423) 22.025,26.982 cw(c21.585,27.423) 21.585,26.8
NetLED34_A: LED34.A R25.2 | length 6.7
  Top Layer w0.5: R25.2@11.7,26.8 LED34.A@15,26.8 ; 12.159,26.8 cw(c12.159,27.259) 11.834,26.934 ccw(c12.159,27.259) 12.159,26.8 ; 12.159,26.8 ccw(c12.159,26.341) 11.834,26.666 cw(c12.159,26.341) 12.159,26.8 ; 14.085,26.8 cw(c14.085,26.177) 14.525,26.618 ccw(c14.085,26.177) 14.085,26.8 ; 14.085,26.8 ccw(c14.085,27.423) 14.525,26.982 cw(c14.085,27.423) 14.085,26.8
NetLED35_A: LED35.A R26.2 | length 6.7
  Top Layer w0.5: R26.2@4.2,26.8 LED35.A@7.5,26.8 ; 4.659,26.8 cw(c4.659,27.259) 4.334,26.934 ccw(c4.659,27.259) 4.659,26.8 ; 4.659,26.8 ccw(c4.659,26.341) 4.334,26.666 cw(c4.659,26.341) 4.659,26.8 ; 6.585,26.8 cw(c6.585,26.177) 7.025,26.618 ccw(c6.585,26.177) 6.585,26.8 ; 6.585,26.8 ccw(c6.585,27.423) 7.025,26.982 cw(c6.585,27.423) 6.585,26.8
NetLED36_A: LED36.A R27.2 | length 6.7
  Top Layer w0.5: R27.2@-3.3,26.8 LED36.A@0,26.8 ; -2.841,26.8 cw(c-2.841,27.259) -3.166,26.934 ccw(c-2.841,27.259) -2.841,26.8 ; -2.841,26.8 ccw(c-2.841,26.341) -3.166,26.666 cw(c-2.841,26.341) -2.841,26.8 ; -0.915,26.8 cw(c-0.915,26.177) -0.475,26.618 ccw(c-0.915,26.177) -0.915,26.8 ; -0.915,26.8 ccw(c-0.915,27.423) -0.475,26.982 cw(c-0.915,27.423) -0.915,26.8
NetLED37_A: LED37.A R28.2 | length 6.7
  Top Layer w0.5: R28.2@-10.8,26.8 LED37.A@-7.5,26.8 ; -10.341,26.8 cw(c-10.341,27.259) -10.666,26.934 ccw(c-10.341,27.259) -10.341,26.8 ; -10.341,26.8 ccw(c-10.341,26.341) -10.666,26.666 cw(c-10.341,26.341) -10.341,26.8 ; -8.415,26.8 cw(c-8.415,26.177) -7.975,26.618 ccw(c-8.415,26.177) -8.415,26.8 ; -8.415,26.8 ccw(c-8.415,27.423) -7.975,26.982 cw(c-8.415,27.423) -8.415,26.8
NetR21_1: R21.1 U30.3 U34.7 U34.8 | length 41.2
  Top Layer w0.2: R21.1@41.6,25.3 44.715,22.185 ; R21.1@41.718,25.357 cw(c41.533,24.753) 42.143,24.917 ; U30.3@44.715,19.8 44.715,22.185 ; U34.8@58.39,21.9 U34.7@57.12,21.9 57.12,24.08 56.2,25 47.53,25 44.715,22.185 ; 44.715,21.536 cw(c43.629,21.536) 44.397,20.768 ccw(c43.629,21.536) 44.715,21.536 ; 44.715,21.536 ccw(c45.801,21.536) 45.033,20.768 cw(c45.801,21.536) 44.715,21.536 ; 44.715,22.019 cw(c43.146,22.019) 44.255,20.91 ccw(c43.146,22.019) 44.715,22.019 ; 44.715,22.019 ccw(c46.284,22.019) 45.175,20.91 cw(c46.284,22.019) 44.715,22.019 ; 57.12,23.083 cw(c56.637,23.083) 56.979,22.741 ccw(c56.637,23.083) 57.12,23.083 ; 57.12,23.083 ccw(c57.603,23.083) 57.261,22.741 cw(c57.603,23.083) 57.12,23.083 ; 57.603,21.9 cw(c57.603,22.383) 57.261,22.041 ccw(c57.603,22.383) 57.603,21.9 ; 57.603,21.9 ccw(c57.603,21.417) 57.261,21.759 cw(c57.603,21.417) 57.603,21.9 ; 57.907,21.9 cw(c57.907,21.417) 58.249,21.759 ccw(c57.907,21.417) 57.907,21.9 ; 57.907,21.9 ccw(c57.907,22.383) 58.249,22.041 cw(c57.907,22.383) 57.907,21.9 ; R21.1@41.7,24.96 cw(c41.7,24.381) 42.11,24.79 ccw(c41.7,24.381) R21.1@41.7,24.96 ; R21.1@41.84,25.3 ccw(c42.419,25.3) 42.01,24.89 cw(c42.419,25.3) R21.1@41.84,25.3 ; R21.1@42.04,25.3 ccw(c43.102,25.3) 42.351,24.549 cw(c43.102,25.3) R21.1@42.04,25.3
NetR22_1: R22.1 U31.3 U34.5 U34.6 | length 58
  Top Layer w0.2: R22.1@34.1,25.3 36.6,22.8 38.8,22.8 39.24,22.36 U31.3@39.24,19.8 39.24,17.96 ; R22.1@34.218,25.357 cw(c34.033,24.753) 34.643,24.917 ; U34.6@55.85,21.9 U34.5@54.58,21.9 54.58,23.82 53.8,24.6 47.696,24.6 46.5,23.404 46.5,18.4 45.5,17.4 39.8,17.4 39.24,17.96 ; 39.24,17.96 cw(c40.004,17.96) 39.591,18.603 ccw(c40.004,17.96) 39.24,17.96 ; 39.24,17.96 ccw(c38.476,17.96) 38.889,18.603 cw(c38.476,17.96) 39.24,17.96 ; 39.24,18.326 cw(c39.769,18.326) 39.483,18.771 ccw(c39.769,18.326) 39.24,18.326 ; 39.24,18.326 ccw(c38.711,18.326) 38.997,18.771 cw(c38.711,18.326) 39.24,18.326 ; 39.24,21.536 cw(c38.154,21.536) 38.922,20.768 ccw(c38.154,21.536) 39.24,21.536 ; 39.24,21.536 ccw(c40.326,21.536) 39.558,20.768 cw(c40.326,21.536) 39.24,21.536 ; 39.24,22.019 cw(c37.671,22.019) 38.78,20.91 ccw(c37.671,22.019) 39.24,22.019 ; 39.24,22.019 ccw(c40.809,22.019) 39.7,20.91 cw(c40.809,22.019) 39.24,22.019 ; 54.58,23.083 cw(c54.097,23.083) 54.439,22.741 ccw(c54.097,23.083) 54.58,23.083 ; 54.58,23.083 ccw(c55.063,23.083) 54.721,22.741 cw(c55.063,23.083) 54.58,23.083 ; 55.063,21.9 cw(c55.063,22.383) 54.721,22.041 ccw(c55.063,22.383) 55.063,21.9 ; 55.063,21.9 ccw(c55.063,21.417) 54.721,21.759 cw(c55.063,21.417) 55.063,21.9 ; 55.367,21.9 cw(c55.367,21.417) 55.709,21.759 ccw(c55.367,21.417) 55.367,21.9 ; 55.367,21.9 ccw(c55.367,22.383) 55.709,22.041 cw(c55.367,22.383) 55.367,21.9 ; R22.1@34.2,24.96 cw(c34.2,24.381) 34.61,24.79 ccw(c34.2,24.381) R22.1@34.2,24.96 ; R22.1@34.34,25.3 ccw(c34.919,25.3) 34.51,24.89 cw(c34.919,25.3) R22.1@34.34,25.3 ; R22.1@34.54,25.3 ccw(c35.602,25.3) 34.851,24.549 cw(c35.602,25.3) R22.1@34.54,25.3
NetR23_1: R23.1 U32.3 U34.3 U34.4 | length 64
  Top Layer w0.2: R23.1@26.6,25.3 29.6,22.3 33.3,22.3 33.74,21.86 ; R23.1@26.718,25.357 cw(c26.533,24.753) 27.143,24.917 ; U34.4@53.31,21.9 U34.3@52.04,21.9 52.04,23.76 51.6,24.2 47.861,24.2 46.9,23.239 46.9,18.234 45.666,17 34.4,17 33.74,17.66 ; 33.74,17.66 cw(c35.123,17.66) 34.182,18.674 ccw(c35.123,17.66) 33.74,17.66 ; 33.74,17.66 ccw(c32.357,17.66) 33.298,18.674 cw(c32.357,17.66) 33.74,17.66 ; 33.74,17.66 U32.3@33.74,19.8 33.74,21.86 ; 33.74,18.119 cw(c34.697,18.119) 34.046,18.82 ccw(c34.697,18.119) 33.74,18.119 ; 33.74,18.119 ccw(c32.783,18.119) 33.434,18.82 cw(c32.783,18.119) 33.74,18.119 ; 33.74,21.426 cw(c32.906,21.426) 33.448,20.792 ccw(c32.906,21.426) 33.74,21.426 ; 33.74,21.426 ccw(c34.574,21.426) 34.032,20.792 cw(c34.574,21.426) 33.74,21.426 ; 33.74,21.86 cw(c32.536,21.86) 33.318,20.944 ccw(c32.536,21.86) 33.74,21.86 ; 33.74,21.86 ccw(c34.944,21.86) 34.162,20.944 cw(c34.944,21.86) 33.74,21.86 ; 52.04,23.083 cw(c51.557,23.083) 51.899,22.741 ccw(c51.557,23.083) 52.04,23.083 ; 52.04,23.083 ccw(c52.523,23.083) 52.181,22.741 cw(c52.523,23.083) 52.04,23.083 ; 52.523,21.9 cw(c52.523,22.383) 52.181,22.041 ccw(c52.523,22.383) 52.523,21.9 ; 52.523,21.9 ccw(c52.523,21.417) 52.181,21.759 cw(c52.523,21.417) 52.523,21.9 ; 52.827,21.9 cw(c52.827,21.417) 53.169,21.759 ccw(c52.827,21.417) 52.827,21.9 ; 52.827,21.9 ccw(c52.827,22.383) 53.169,22.041 cw(c52.827,22.383) 52.827,21.9 ; R23.1@26.7,24.96 cw(c26.7,24.381) 27.11,24.79 ccw(c26.7,24.381) R23.1@26.7,24.96 ; R23.1@26.84,25.3 ccw(c27.419,25.3) 27.01,24.89 cw(c27.419,25.3) R23.1@26.84,25.3 ; R23.1@27.04,25.3 ccw(c28.102,25.3) 27.351,24.549 cw(c28.102,25.3) R23.1@27.04,25.3
NetR24_1: R24.1 U33.3 U34.1 U34.2 | length 63.4
  Top Layer w0.2: R24.1@19.1,25.3 19.1,24.1 20,23.2 26.6,23.2 28.24,21.56 ; U34.2@50.77,21.9 U34.1@49.5,21.9 48.2,21.9 47.3,21 47.3,18.069 45.831,16.6 29,16.6 28.24,17.36 U33.3@28.24,19.8 28.24,21.56 ; 19.1,24.721 cw(c19.779,24.721) 19.299,25.201 ccw(c19.779,24.721) 19.1,24.721 ; 19.1,24.721 ccw(c18.621,24.721) 18.96,25.06 cw(c18.621,24.721) 19.1,24.721 ; 28.24,17.581 cw(c29.809,17.581) 28.7,18.69 ccw(c29.809,17.581) 28.24,17.581 ; 28.24,17.581 ccw(c26.671,17.581) 27.78,18.69 cw(c26.671,17.581) 28.24,17.581 ; 28.24,18.064 cw(c29.326,18.064) 28.558,18.832 ccw(c29.326,18.064) 28.24,18.064 ; 28.24,18.064 ccw(c27.154,18.064) 27.922,18.832 cw(c27.154,18.064) 28.24,18.064 ; 28.24,21.218 cw(c27.809,21.218) 28.02,20.842 ccw(c27.809,21.218) 28.24,21.218 ; 28.24,21.218 ccw(c28.671,21.218) 28.46,20.842 cw(c28.671,21.218) 28.24,21.218 ; 28.24,21.56 cw(c27.617,21.56) 27.922,21.017 ccw(c27.617,21.56) 28.24,21.56 ; 28.24,21.56 ccw(c28.863,21.56) 28.558,21.017 cw(c28.863,21.56) 28.24,21.56 ; 49.017,21.9 cw(c49.017,21.417) 49.359,21.759 ccw(c49.017,21.417) 49.017,21.9 ; 49.017,21.9 ccw(c49.017,22.383) 49.359,22.041 cw(c49.017,22.383) 49.017,21.9 ; 49.983,21.9 cw(c49.983,22.383) 49.641,22.041 ccw(c49.983,22.383) 49.983,21.9 ; 49.983,21.9 ccw(c49.983,21.417) 49.641,21.759 cw(c49.983,21.417) 49.983,21.9 ; 50.287,21.9 cw(c50.287,21.417) 50.629,21.759 ccw(c50.287,21.417) 50.287,21.9 ; 50.287,21.9 ccw(c50.287,22.383) 50.629,22.041 cw(c50.287,22.383) 50.287,21.9 ; 19.1,24.238 cw(c20.262,24.238) 19.44,25.06 ccw(c20.262,24.238) 19.1,24.238
NetR25_1: R25.1 U35.3 U39.7 U39.8 | length 79.3
  Top Layer w0.2: R25.1@11.6,25.3 11.6,23.7 12.5,22.8 21.6,22.8 22.74,21.66 ; U39.8@58.39,7.8 U39.7@57.12,7.8 57.12,10.98 56.3,11.8 50.197,11.8 45.797,16.2 24.325,16.2 22.74,17.785 ; 11.6,24.721 cw(c12.279,24.721) 11.799,25.201 ccw(c12.279,24.721) 11.6,24.721 ; 11.6,24.721 ccw(c11.121,24.721) 11.46,25.06 cw(c11.121,24.721) 11.6,24.721 ; 22.74,17.786 cw(c23.847,17.786) 23.15,18.645 ccw(c23.847,17.786) 22.74,17.786 ; 22.74,17.786 ccw(c21.633,17.786) 22.33,18.645 cw(c21.633,17.786) 22.74,17.786 ; 22.74,17.785 U35.3@22.74,19.8 22.74,21.66 ; 22.74,18.205 cw(c23.506,18.205) 23.024,18.801 ccw(c23.506,18.205) 22.74,18.205 ; 22.74,18.205 ccw(c21.974,18.205) 22.456,18.801 cw(c21.974,18.205) 22.74,18.205 ; 22.74,21.288 cw(c22.185,21.288) 22.492,20.825 ccw(c22.185,21.288) 22.74,21.288 ; 22.74,21.288 ccw(c23.295,21.288) 22.988,20.825 cw(c23.295,21.288) 22.74,21.288 ; 22.74,21.66 cw(c21.939,21.66) 22.381,20.992 ccw(c21.939,21.66) 22.74,21.66 ; 22.74,21.66 ccw(c23.541,21.66) 23.099,20.992 cw(c23.541,21.66) 22.74,21.66 ; 57.12,8.983 cw(c56.637,8.983) 56.979,8.641 ccw(c56.637,8.983) 57.12,8.983 ; 57.12,8.983 ccw(c57.603,8.983) 57.261,8.641 cw(c57.603,8.983) 57.12,8.983 ; 57.603,7.8 cw(c57.603,8.283) 57.261,7.941 ccw(c57.603,8.283) 57.603,7.8 ; 57.603,7.8 ccw(c57.603,7.317) 57.261,7.659 cw(c57.603,7.317) 57.603,7.8 ; 57.907,7.8 cw(c57.907,7.317) 58.249,7.659 ccw(c57.907,7.317) 57.907,7.8 ; 57.907,7.8 ccw(c57.907,8.283) 58.249,7.941 cw(c57.907,8.283) 57.907,7.8 ; 11.6,24.238 cw(c12.762,24.238) 11.94,25.06 ccw(c12.762,24.238) 11.6,24.238
NetR26_1: R26.1 U36.3 U39.5 U39.6 | length 87.7
  Top Layer w0.2: R26.1@4.1,25.3 6.1,23.3 10.866,23.3 11.766,22.4 16.9,22.4 17.24,22.06 U36.3@17.24,19.8 17.24,17.66 ; R26.1@4.218,25.357 cw(c4.033,24.753) 4.643,24.917 ; U39.6@55.85,7.8 U39.5@54.58,7.8 54.58,10.22 53.4,11.4 50.031,11.4 45.631,15.8 24.16,15.8 22.66,17.3 17.6,17.3 17.24,17.66 ; 17.24,17.66 cw(c18.623,17.66) 17.682,18.674 ccw(c18.623,17.66) 17.24,17.66 ; 17.24,17.66 ccw(c15.857,17.66) 16.798,18.674 cw(c15.857,17.66) 17.24,17.66 ; 17.24,18.119 cw(c18.197,18.119) 17.546,18.82 ccw(c18.197,18.119) 17.24,18.119 ; 17.24,18.119 ccw(c16.283,18.119) 16.934,18.82 cw(c16.283,18.119) 17.24,18.119 ; 17.24,21.536 cw(c16.154,21.536) 16.922,20.768 ccw(c16.154,21.536) 17.24,21.536 ; 17.24,21.536 ccw(c18.326,21.536) 17.558,20.768 cw(c18.326,21.536) 17.24,21.536 ; 17.24,22.019 cw(c15.671,22.019) 16.78,20.91 ccw(c15.671,22.019) 17.24,22.019 ; 17.24,22.019 ccw(c18.809,22.019) 17.7,20.91 cw(c18.809,22.019) 17.24,22.019 ; 54.58,8.983 cw(c54.097,8.983) 54.439,8.641 ccw(c54.097,8.983) 54.58,8.983 ; 54.58,8.983 ccw(c55.063,8.983) 54.721,8.641 cw(c55.063,8.983) 54.58,8.983 ; 55.063,7.8 cw(c55.063,8.283) 54.721,7.941 ccw(c55.063,8.283) 55.063,7.8 ; 55.063,7.8 ccw(c55.063,7.317) 54.721,7.659 cw(c55.063,7.317) 55.063,7.8 ; 55.367,7.8 cw(c55.367,7.317) 55.709,7.659 ccw(c55.367,7.317) 55.367,7.8 ; 55.367,7.8 ccw(c55.367,8.283) 55.709,7.941 cw(c55.367,8.283) 55.367,7.8 ; R26.1@4.2,24.96 cw(c4.2,24.381) 4.61,24.79 ccw(c4.2,24.381) R26.1@4.2,24.96 ; R26.1@4.34,25.3 ccw(c4.919,25.3) 4.51,24.89 cw(c4.919,25.3) R26.1@4.34,25.3 ; R26.1@4.54,25.3 ccw(c5.602,25.3) 4.851,24.549 cw(c5.602,25.3) R26.1@4.54,25.3
NetR27_1: R27.1 U37.3 U39.3 U39.4 | length 92.6
  Top Layer w0.2: R27.1@-3.4,25.3 -3.4,23.7 -2.6,22.9 10.7,22.9 11.74,21.86 ; U39.4@53.31,7.8 U39.3@52.04,7.8 52.04,10.46 51.5,11 49.866,11 45.466,15.4 23.994,15.4 22.494,16.9 12.3,16.9 11.74,17.46 U37.3@11.74,19.8 11.74,21.86 ; -3.4,24.721 cw(c-2.721,24.721) -3.201,25.201 ccw(c-2.721,24.721) -3.4,24.721 ; -3.4,24.721 ccw(c-3.879,24.721) -3.54,25.06 cw(c-3.879,24.721) -3.4,24.721 ; 11.74,17.581 cw(c13.309,17.581) 12.2,18.69 ccw(c13.309,17.581) 11.74,17.581 ; 11.74,17.581 ccw(c10.171,17.581) 11.28,18.69 cw(c10.171,17.581) 11.74,17.581 ; 11.74,18.064 cw(c12.826,18.064) 12.058,18.832 ccw(c12.826,18.064) 11.74,18.064 ; 11.74,18.064 ccw(c10.654,18.064) 11.422,18.832 cw(c10.654,18.064) 11.74,18.064 ; 11.74,21.426 cw(c10.906,21.426) 11.448,20.792 ccw(c10.906,21.426) 11.74,21.426 ; 11.74,21.426 ccw(c12.574,21.426) 12.032,20.792 cw(c12.574,21.426) 11.74,21.426 ; 11.74,21.86 cw(c10.536,21.86) 11.318,20.944 ccw(c10.536,21.86) 11.74,21.86 ; 11.74,21.86 ccw(c12.944,21.86) 12.162,20.944 cw(c12.944,21.86) 11.74,21.86 ; 52.04,8.983 cw(c51.557,8.983) 51.899,8.641 ccw(c51.557,8.983) 52.04,8.983 ; 52.04,8.983 ccw(c52.523,8.983) 52.181,8.641 cw(c52.523,8.983) 52.04,8.983 ; 52.523,7.8 cw(c52.523,8.283) 52.181,7.941 ccw(c52.523,8.283) 52.523,7.8 ; 52.523,7.8 ccw(c52.523,7.317) 52.181,7.659 cw(c52.523,7.317) 52.523,7.8 ; 52.827,7.8 cw(c52.827,7.317) 53.169,7.659 ccw(c52.827,7.317) 52.827,7.8 ; 52.827,7.8 ccw(c52.827,8.283) 53.169,7.941 cw(c52.827,8.283) 52.827,7.8 ; -3.4,24.238 cw(c-2.238,24.238) -3.06,25.06 ccw(c-2.238,24.238) -3.4,24.238
NetR28_1: R28.1 U38.3 U39.1 U39.2 | length 98.8
  Top Layer w0.2: R28.1@-10.9,25.3 -10.9,23.5 -9.9,22.5 5.7,22.5 6.24,21.96 ; U39.2@50.77,7.8 U39.1@49.5,7.8 49.5,10.8 45.3,15 23.828,15 22.328,16.5 7.1,16.5 6.24,17.36 U38.3@6.24,19.8 6.24,21.96 ; -10.9,24.721 cw(c-10.221,24.721) -10.701,25.201 ccw(c-10.221,24.721) -10.9,24.721 ; -10.9,24.721 ccw(c-11.379,24.721) -11.04,25.06 cw(c-11.379,24.721) -10.9,24.721 ; 6.24,17.581 cw(c7.809,17.581) 6.7,18.69 ccw(c7.809,17.581) 6.24,17.581 ; 6.24,17.581 ccw(c4.671,17.581) 5.78,18.69 cw(c4.671,17.581) 6.24,17.581 ; 6.24,18.064 cw(c7.326,18.064) 6.558,18.832 ccw(c7.326,18.064) 6.24,18.064 ; 6.24,18.064 ccw(c5.154,18.064) 5.922,18.832 cw(c5.154,18.064) 6.24,18.064 ; 6.24,21.495 cw(c5.251,21.495) 5.931,20.777 ccw(c5.251,21.495) 6.24,21.495 ; 6.24,21.495 ccw(c7.229,21.495) 6.549,20.777 cw(c7.229,21.495) 6.24,21.495 ; 6.24,21.96 cw(c4.811,21.96) 5.793,20.922 ccw(c4.811,21.96) 6.24,21.96 ; 6.24,21.96 ccw(c7.669,21.96) 6.687,20.922 cw(c7.669,21.96) 6.24,21.96 ; 49.5,8.983 cw(c49.017,8.983) 49.359,8.641 ccw(c49.017,8.983) 49.5,8.983 ; 49.5,8.983 ccw(c49.983,8.983) 49.641,8.641 cw(c49.983,8.983) 49.5,8.983 ; 49.983,7.8 cw(c49.983,8.283) 49.641,7.941 ccw(c49.983,8.283) 49.983,7.8 ; 49.983,7.8 ccw(c49.983,7.317) 49.641,7.659 cw(c49.983,7.317) 49.983,7.8 ; 50.287,7.8 cw(c50.287,7.317) 50.629,7.659 ccw(c50.287,7.317) 50.287,7.8 ; 50.287,7.8 ccw(c50.287,8.283) 50.629,7.941 cw(c50.287,8.283) 50.287,7.8 ; -10.9,24.238 cw(c-9.738,24.238) -10.56,25.06 ccw(c-9.738,24.238) -10.9,24.238